# Altium PCB MapleBreakout.PcbDoc
Units mm, origin at the board's own origin, x right, y up, seen from the top; angles counter-clockwise.
Board outline 42.5 x 22 mm, 2 copper layers (Top Layer, Bottom Layer), stack 1.569 mm thick; 4 components, 13 nets, 66 pads, 16 vias.
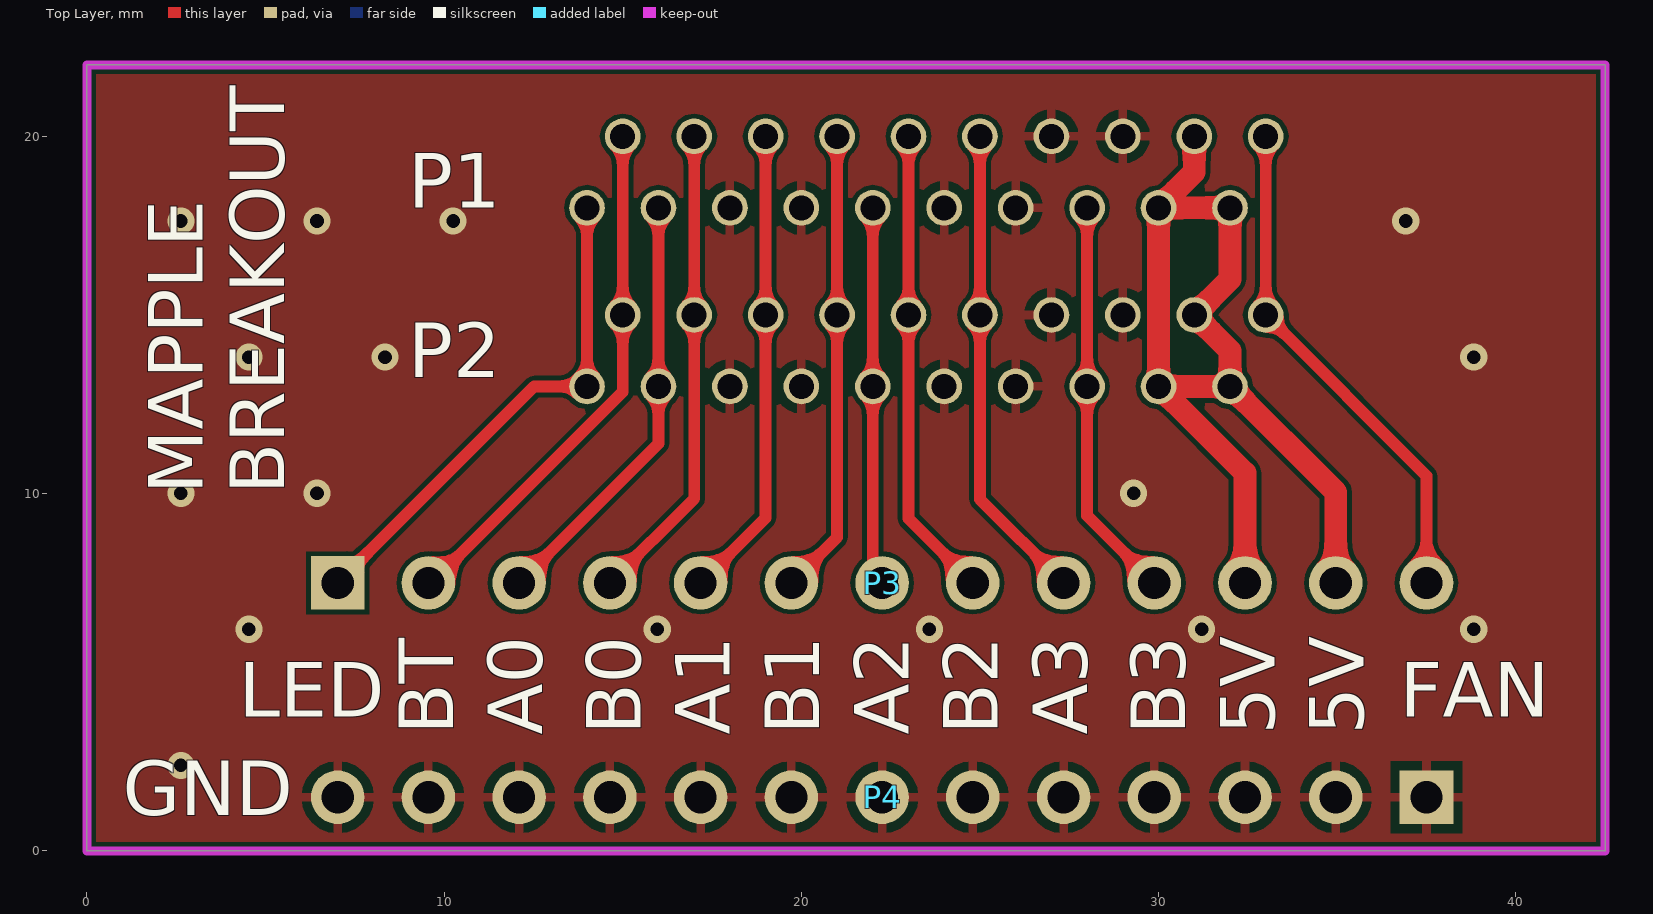
[diagram p0: Top Layer view]
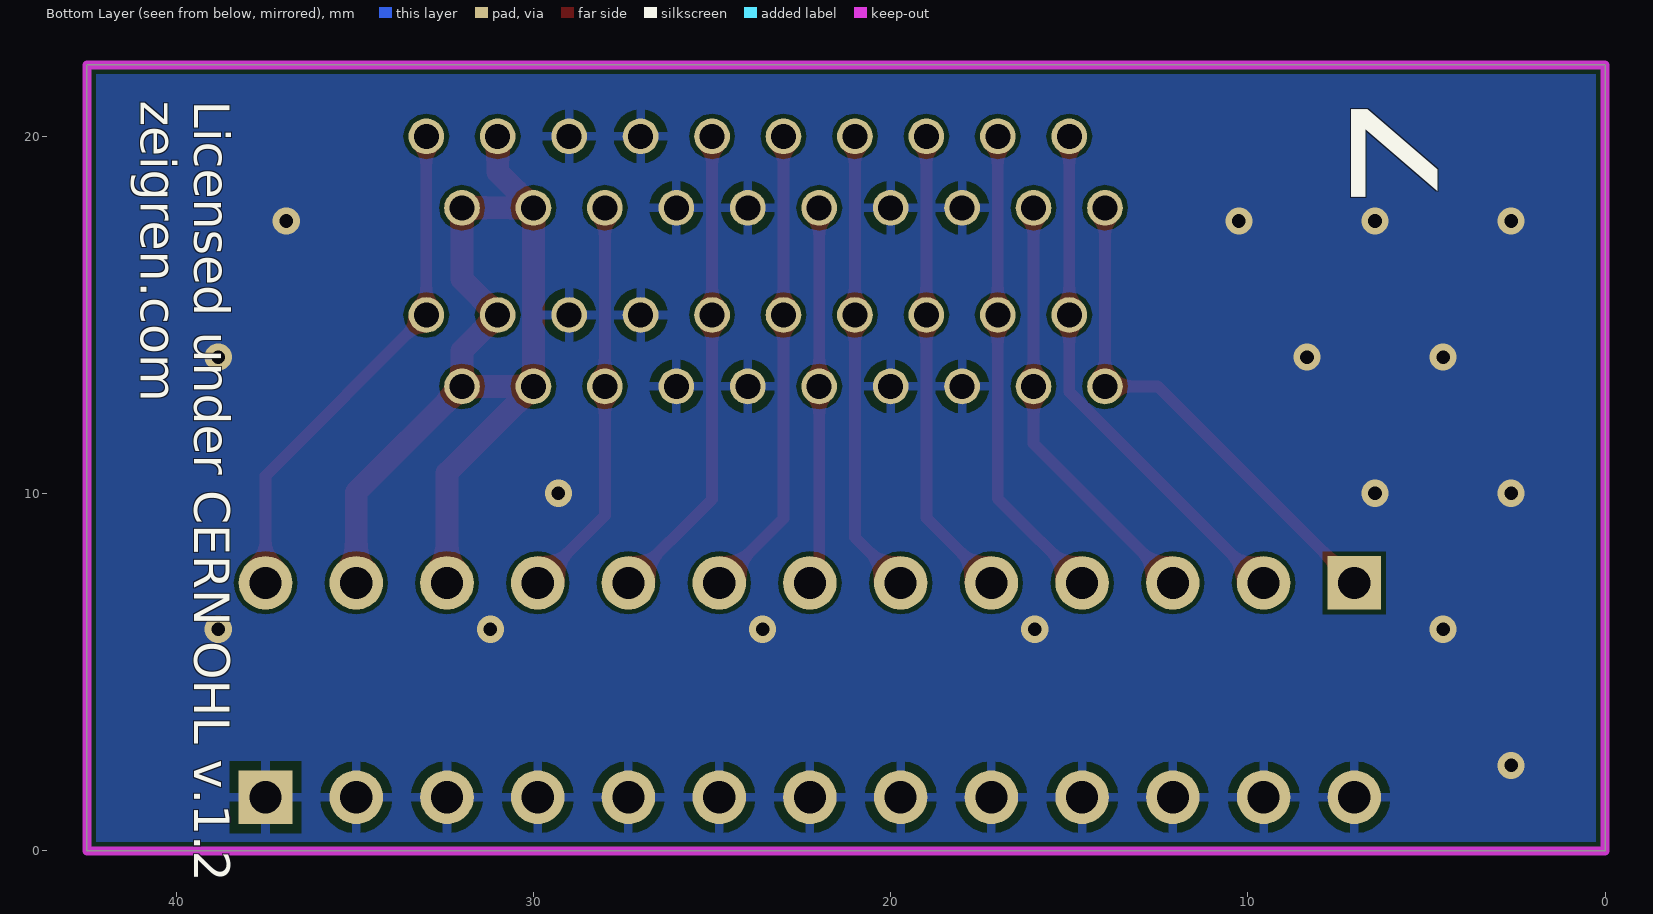
[diagram p1: Bottom Layer view, seen from below]

## Layer stack, top to bottom
Top Solder: solder mask 0.0254, SM-001, Dk 4
Top Layer: signal copper 0.035
Dielectric 1: core 1.4986, Core-043, Dk 4.3
Bottom Layer: signal copper 0.035
Bottom Solder: solder mask 0.0254, SM-001, Dk 4

## Board outline
0,0 0,22 42.5,22 42.5,0

## Design rules (kind name [scope] priority, off if disabled: settings)
BoardOutlineClearance [All] p1: gap=0.2 ignorepadtopadclearanceinfootprint=FALSE
Clearance [All] p1: gap=0.127 ignorepadtopadclearanceinfootprint=FALSE except(0: Arc-Hole Track-Hole SMDPad-Hole THPad-Hole Via-Hole Fill-Hole Poly-Hole Region-Hole Text-Hole)
ComponentClearance [All] p1: gap=0.254 collisioncheckmode=3 verticalgap=2540 showdistances=FALSE
HoleSize [All] p1: absolutevalues=TRUE maxlimit=6.3 minlimit=0.3 maxpercent=80.000 minpercent=20.000
MinimumAnnularRing [All] p1: minimumring=0.076
MinimumSolderMaskSliver [All] p1: minsoldermaskwidth=0.102
PasteMaskExpansion [All] p1: expansion=0.051
PlaneConnect [All] p1: pad.planeconnectstyle=Relief pad.reliefexpansion=0.508 pad.reliefentries=4 pad.reliefconductorwidth=0.254 pad.reliefairgap=0.254 via.planeconnectstyle=Direct via.reliefexpansion=0.508 via.reliefentries=4 via.reliefconductorwidth=0.254 via.reliefairgap=0.254
PolygonConnect [All] p1: thpad.connectstyle=Relief thpad.reliefconductorwidth=0.254 thpad.reliefentries=4 thpad.polygonreliefangle="90 Angle" thpad.airgapwidth=0.254 smdpad.connectstyle=Relief smdpad.reliefconductorwidth=0.254 smdpad.reliefentries=4 smdpad.polygonreliefangle="90 Angle" smdpad.airgapwidth=0.254 via.connectstyle=Direct via.reliefconductorwidth=0.254 via.reliefentries=4 via.polygonreliefangle="90 Angle" via.airgapwidth=0.254
RoutingVias [All] p1: holewidth=0.3 width=0.6 viastyle="Through Hole" minholewidth=0.3 minwidth=0.6 maxholewidth=6.3 maxwidth=6.5
SMDEntry [All] p1: side=TRUE corner=TRUE anyangle=FALSE
SMDNeckDown [All] p1: percent=50.000
SilkToSilkClearance [All] p1: silktosilkclearance=0.152
SilkToSolderMaskClearance [IsPad] p1: minsilkscreentomaskgap=0.152 clearancetoexposedcopper=TRUE
SolderMaskExpansion [All] p1: expansion=0.025
UnRoutedNet [All] p1: checkbadconnections=TRUE
Width [All] p1: maxlimit=2.54 minlimit=0.127 preferedwidth=0.152
22 further rules are at their usual default settings.

## Components (designator, comment, footprint, x,y, rotation, side; value= is the part's Value field where it differs from the comment)
P1 "20PIN FPC HLW20S-2C7LF" HLW20S-2C7LF 14,18 r0 top locked
P2 "20PIN FPC HLW20S-2C7LF" HLW20S-2C7LF 14,13 r0 top locked
P3 "Header 13" HDR1X13 7.02,7.5 r0 top locked
P4 "Header 13" HDR1X13 37.5,1.5 r180 top locked

## Footprints (in the part's own frame and the unit in brackets; to place one, negate y for a bottom-side part, rotate by r counter-clockwise, add the part's x,y. Pads: shape width x height; smd on the part's side, far side on the other; paste and mask are expansions set on the pad)
HDR1X13 [mm] "Connector; Header; 13 Position"
  rect 1.5x1.5 hole 0.9: 1(0,0)
  round 1.5 hole 0.9: 2(2.54,0) 3(5.08,0) 4(7.62,0) 5(10.16,0) 6(12.7,0) 7(15.24,0) 8(17.78,0) 9(20.32,0) 10(22.86,0) 11(25.4,0) 12(27.94,0) 13(30.48,0)
HLW20S-2C7LF [mm]
  round 1 hole 0.7: 1(0,0) 2(1,2) 3(2,0) 4(3,2) 5(4,0) 6(5,2) 7(6,0) 8(7,2) 9(8,0) 10(9,2) 11(10,0) 12(11,2) 13(12,0) 14(13,2) 15(14,0) 16(15,2) 17(16,0) 18(17,2) 19(18,0) 20(19,2)
  body extent -1.8,-0.95 20.8,2.95, height 5.95

## Part data
P1 P2: Actuator Color=-, Current Rating=1A, Housing Color=Black, Manufacturer="Amphenol FCI", Manufacturer Part Number=HLW20S-2C7LF, Material Flammability Rating="UL94 V-0", Operating Temperature="-55°C ~ 85°C", Supplier Part Number 1=609-1835-ND, Voltage Rating=100V, Actuator Material=-, Cable End Type="Straight or Tapered", Category="Connectors, Interconnects", ComponentLink1Description=https://cdn.amphenol-icc.com/media/wysiwyg/files/drawing/hlw01lf.pdf, ComponentLink1URL=https://cdn.amphenol-icc.com/media/wysiwyg/files/drawing/hlw01lf.pdf, Connector/Contact Type="Contacts, Vertical, 1 Sided", Contact Finish=Tin, Contact Finish Thickness=-, Contact Material="Phosphor Bronze", Features=-, FFC, FCB Thickness=0.30mm, Flat Flex Type="FFC, FPC", Height Above Board="0.232\" (5.90mm)", Housing Material="Polybutylene Terephthalate (PBT), Glass Filled", Locking Feature=-, Mating Cycles=30, Mounting Type="Through Hole", Number of Positions=20, Packaging=Tray, Part Status=Active, Pitch="0.039\" (1.00mm)", Pricing 1="1=0.22, 10=0.206, 25=0.1752, 50=0.1534, 100=0.1425, 250=0.12604, 500=0.12056, 1000=0.09864, 2500=0.09042 (USD)", RoHS="RoHS Compliant", Stock 1=11610, Supplier 1=Digi-Key, Termination="Kinked Pin"
P3 P4: "Header, 13-Pin", LatestRevisionDate=17-Jul-2002, LatestRevisionNote="Re-released for DXP Platform.", Publisher="Altium Limited"

## Via types
v1: diameter 0.762, hole 0.381, Top Layer to Bottom Layer, tented both sides, 16 vias

## Nets (pads, with @x,y where several pads share a name; then routed paths per layer and width w, separated by ;. In a path a pad name is that pad's centre, name@x,y a point inside that pad or via, vN(x,y) a via of type N, cw(c..) or ccw(c..) an arc to the next point about the centre after c; other vN are vias at no path point)
5V: P1.17 P1.18 P1.19 P2.17 P2.18 P2.19 P3.11 P3.12 | length 30.5
  Top Layer w0.635: P1.18 31,19 P1.17 ; P3.11 32.42,10.58 P2.17 ; P3.12 34.96,10.04 P2.19 ; P2.17 P2.19 ; P2.17 P1.17 ; P1.17 P1.19 32,16 P2.18 32,14 P2.19
A0: P1.3 P2.3 P3.3 | length 12.1
  Top Layer w0.33: P3.3 16,11.4 P2.3 P1.3
A1: P1.6 P2.6 P3.5 | length 13.3
  Top Layer w0.33: P3.5 19,9.32 P2.6 P1.6
A2: P1.9 P2.9 P3.7 | length 10.6
  Top Layer w0.33: P1.9 P2.9 22,7.76 P3.7
A3: P1.12 P2.12 P3.9 | length 13.5
  Top Layer w0.33: P1.12 P2.12 25,9.84 P3.9
B0: P1.4 P2.4 P3.4 | length 13.5
  Top Layer w0.33: P3.4 17,9.86 P2.4 P1.4
B1: P1.8 P2.8 P3.6 | length 13
  Top Layer w0.33: P3.6 21,8.78 P2.8 P1.8
B2: P1.10 P2.10 P3.8 | length 13.2
  Top Layer w0.33: P1.10 P2.10 23,9.3 P3.8
B3: P1.15 P2.15 P3.10 | length 11.3
  Top Layer w0.33: P1.15 P2.15 28,9.38 P3.10
BATT: P1.2 P2.2 P3.2 | length 14.8
  Top Layer w0.33: P3.2 9.656,7.5 15,12.844 P2.2 P1.2
FAN: P1.20 P2.20 P3.13 | length 14.4
  Top Layer w0.33: P1.20 P2.20 37.5,10.5 P3.13
GND: P1.5 P1.7 P1.11 P1.13 P1.14 P1.16 P2.5 P2.7 P2.11 P2.13 P2.14 P2.16 P4.1 P4.2 P4.3 P4.4 P4.5 P4.6 P4.7 P4.8 P4.9 P4.10 P4.11 P4.12 P4.13
  other v1: 2.63,2.39 4.535,6.2 15.965,6.2 23.585,6.2 31.205,6.2 38.825,6.2 2.63,10.01 6.44,10.01 29.3,10.01 4.535,13.82 8.345,13.82 38.825,13.82 2.63,17.63 6.44,17.63 10.25,17.63 36.92,17.63
LED: P1.1 P2.1 P3.1 | length 14.3
  Top Layer w0.33: P3.1 12.52,13 P2.1 P1.1

## Polygon pours and split planes (outlines as drawn)
GND on Bottom Layer "BOTGND" (solid, remove dead copper, pour order 0): -1,23 -1,-1 43,-1 43,23
GND on Top Layer "TOPGND" (solid, remove dead copper, pour order 2): -1,23 -1,-1 43,-1 43,23

## Keep-outs
Keep-Out Layer:
  the board outline again, w0.254

## Silkscreen, mask and mechanical layers (free items; w line width, h text height)
Top Overlay:
  text "MAPPLE / BREAKOUT" at 5.526,9.985 h1.52 r90
  text "LED" at 4.25,3.75 h1.52
  text "FAN" at 36.75,3.75 h1.52
  text "BT" at 10.25,3.25 h1.52 r90
  text "A0" at 12.75,3.25 h1.52 r90
  text "B0" at 15.5,3.25 h1.52 r90
  text "A1" at 18,3.25 h1.52 r90
  text "B1" at 20.5,3.25 h1.52 r90
  text "A2" at 23,3.25 h1.52 r90
  text "B2" at 25.5,3.25 h1.52 r90
  text "A3" at 28,3.25 h1.52 r90
  text "B3" at 30.75,3.25 h1.52 r90
  text "5V" at 33.25,3.25 h1.52 r90
  text "5V" at 35.75,3.25 h1.52 r90
  text "GND" at 1,1 h1.52
Bottom Overlay:
  text "z" at 9,21 h10 r90
  text "Licensed under CERN OHL v.1.2 / zeigren.com" at 41,21 h1 r90